# EAGLE board PiHAT_SSR_V3 (EAGLE 9.1.3)
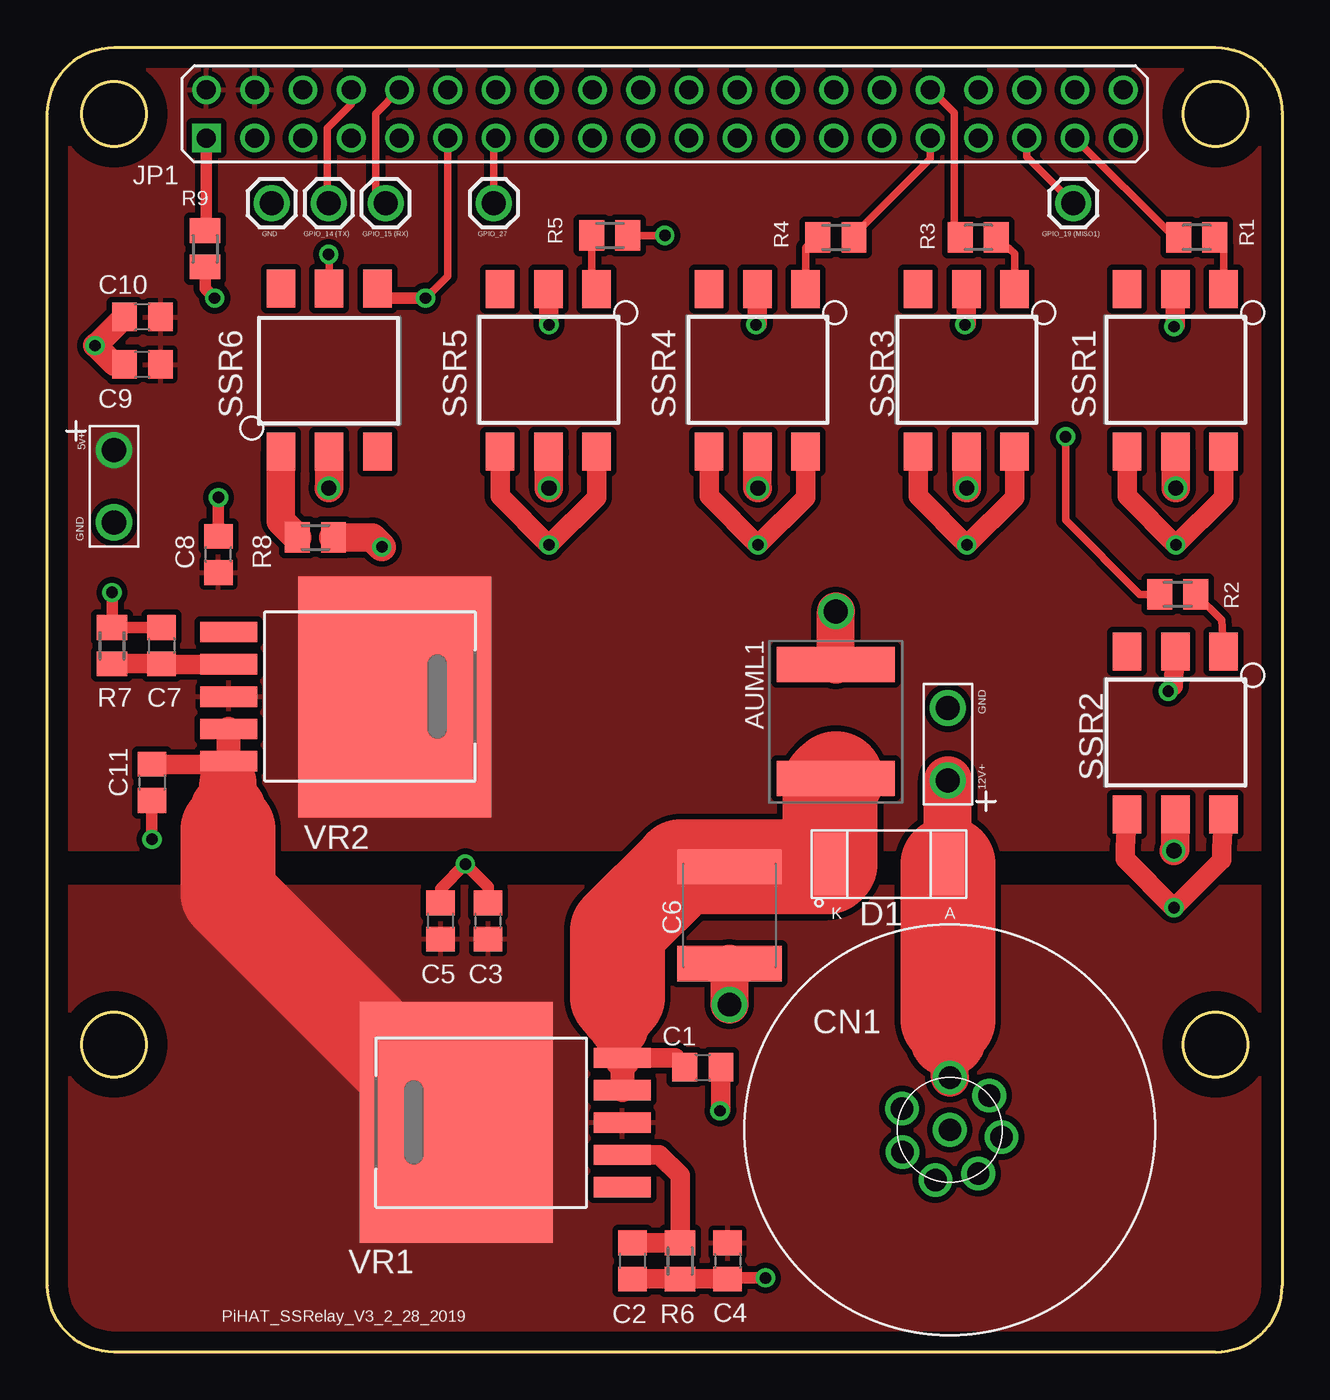
[diagram p0: board, top side]
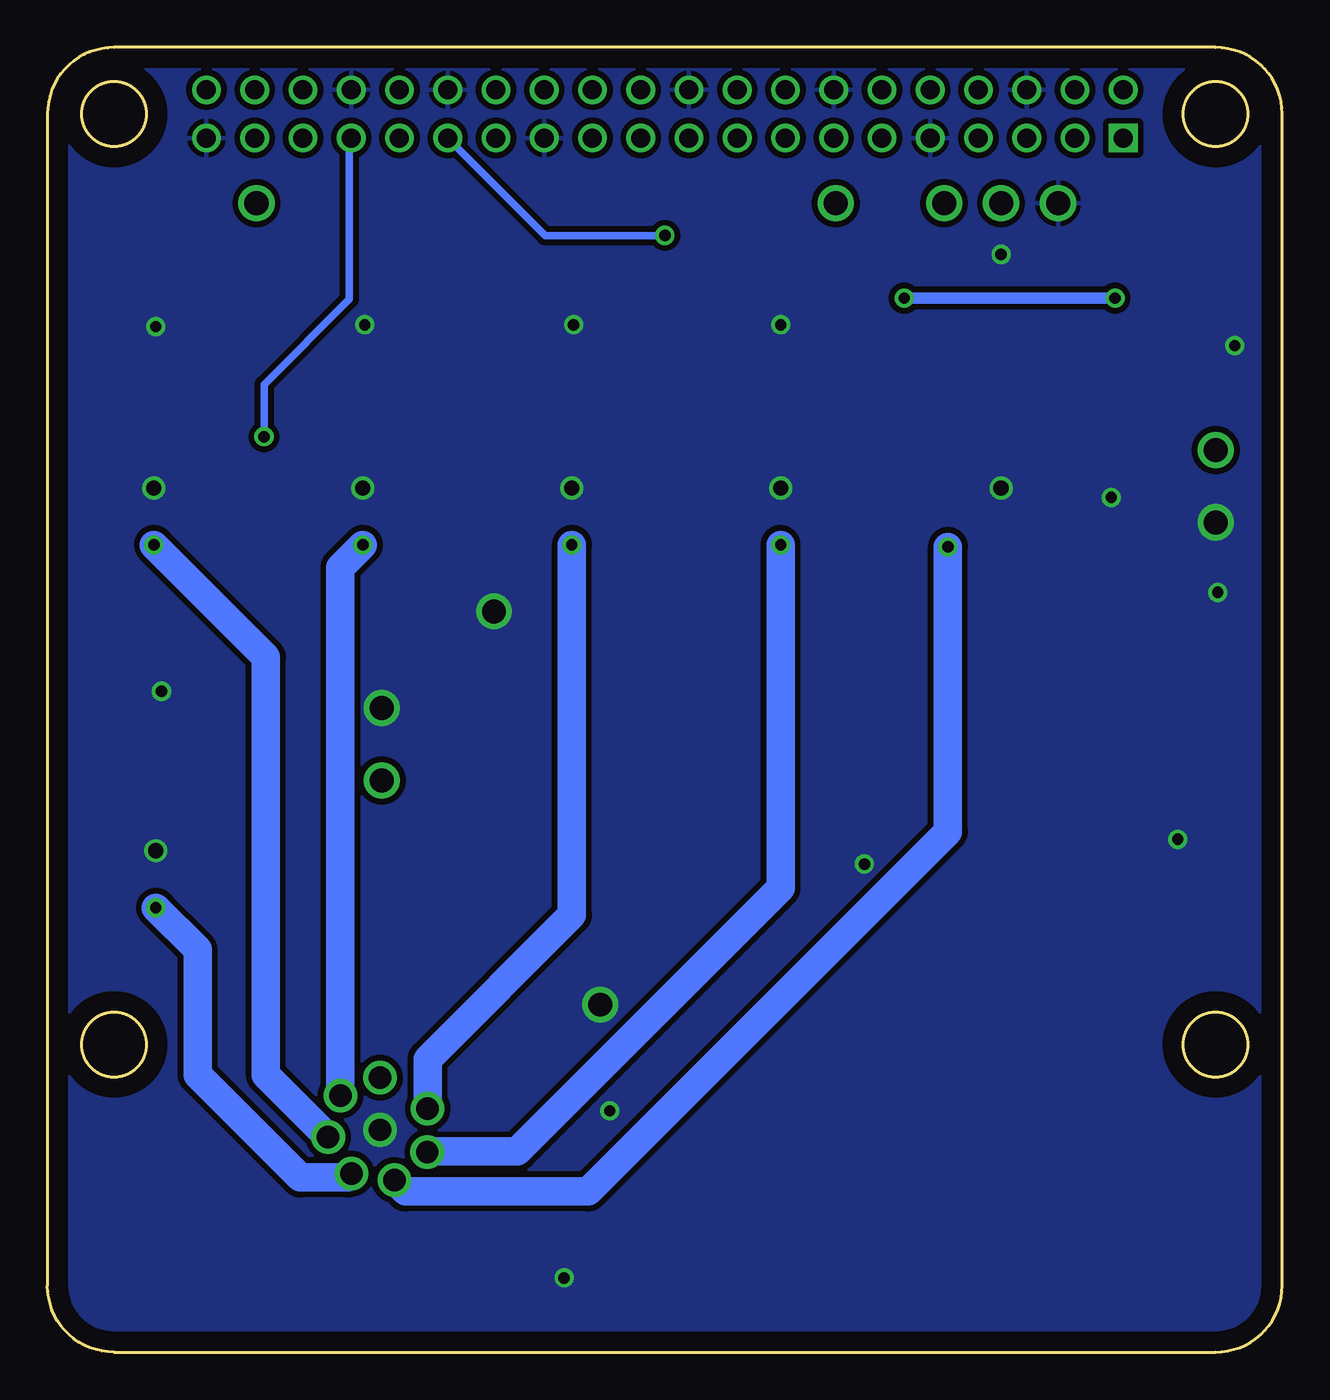
[diagram p1: board, bottom side, seen from below]

Size 65 x 68.7 mm. Coordinates in mm from the lower left corner, seen from the top.
Outline: 0,3.5 0,65.2 arc-90 3.5,68.7 61.5,68.7 arc-90 65,65.2 65,3.5 arc-90 61.5,0 3.5,0 arc-90 0,3.5
Outline: circle at 3.5,16.2 radius 1.7
Outline: circle at 3.5,65.2 radius 1.7
Outline: circle at 61.5,65.2 radius 1.7
Outline: circle at 61.5,16.2 radius 1.7
Copper layers (1*16): Top 0.035mm / dielectric 1.5mm / Bottom 0.035mm
Design rules "default *": minimum track width 10mil, minimum drill 6mil, track to track 12mil, track to pad 12mil, pad to pad 12mil, via to via 12mil, smd to smd 8mil, copper to edge 40mil, drill to drill 8mil, minimum pad ring 10mil, minimum via ring 8mil, stop-mask expansion 4mil, vias tented up to drill 0mil, thermal gap 10mil
tKeepout: area 0,62.7 to 6,68.7; area 59,62.7 to 65,68.7; area 0,12.7 to 6.5,19.2; area 58.5,12.7 to 65,19.2

## Footprints (pad centres in the part's own frame; a part is rotated, then mirrored left to right if it is on the bottom)
SMD-SPECIAL_28PIN_PIC32_11_3_2011_MOD5_20_13_SMT_CAP_2220 = smd 1.85 x 6.2: 1 -3,0; 2 3,0
C0805 = smd 1.3 x 1.5: 1 -0.95,0; 2 0.95,0
C2220K = smd 1.85 x 5.5: 1 -2.55,0; 2 2.55,0
M12_8PIN_CODE_A = drill 1.18: P$1 2.75,0; P$2 1.119,2.512; P$3 -1.162,2.492; P$4 -2.643,0.758; P$5 -2.306,-1.498; P$6 -0.383,-2.723; P$7 1.804,-2.075; P$8 0,0
SCHOTTKY_DIODE_SMD_DO-214AB = smd 1.651 x 3.302: P$1 -3.099,0; P$2 3.099,0
1X01 = drill 1.27: 1 0,0
1X02_BIG = drill 1.27: P$1 0,0; P$2 3.81,0
2X20 = drill 1 square: 1 -24.13,-1.27 | drill 1: 2 -24.13,1.27; 3 -21.59,-1.27; 4 -21.59,1.27; 5 -19.05,-1.27; 6 -19.05,1.27; 7 -16.51,-1.27; 8 -16.51,1.27; 9 -13.97,-1.27; 10 -13.97,1.27; 11 -11.43,-1.27; 12 -11.43,1.27; 13 -8.89,-1.27; 14 -8.89,1.27; 15 -6.35,-1.27; 16 -6.35,1.27; 17 -3.81,-1.27; 18 -3.81,1.27; 19 -1.27,-1.27; 20 -1.27,1.27; 21 1.27,-1.27; 22 1.27,1.27; 23 3.81,-1.27; 24 3.81,1.27; 25 6.35,-1.27; 26 6.35,1.27; 27 8.89,-1.27; 28 8.89,1.27; 29 11.43,-1.27; 30 11.43,1.27; 31 13.97,-1.27; 32 13.97,1.27; 33 16.51,-1.27; 34 16.51,1.27; 35 19.05,-1.27; 36 19.05,1.27; 37 21.59,-1.27; 38 21.59,1.27; 39 24.13,-1.27; 40 24.13,1.27
M0805 = smd 1.3 x 1.6: 1 -0.95,0; 2 0.95,0
SPARKFUN_6-SMD_OMRON_SSRELAY = smd 1.5 x 2: 1 -3.81,-5.08; 2 -1.27,-5.08; 3 1.27,-5.08; 4 1.27,3.493; 5 -1.27,3.493; 6 -3.81,3.493
SMD-SPECIAL_28PIN_PIC32_11_3_2011_DPAK-5 = smd 1.067 x 2.997: 1 -3.416,-7.468; 2 -1.714,-7.468; 3 -0.013,-7.468; 4 1.689,-7.468; 5 3.391,-7.468 | smd 12.7 x 10.16: 6 0,1.27

## Placement (x,y rotation side)
AUML1  SMD-SPECIAL_28PIN_PIC32_11_3_2011_MOD5_20_13_AUML_MULTI-LAYER-VARISTOR  [SMD-SPECIAL_28PIN_PIC32_11_3_2011_MOD5_20_13_SMT_CAP_2220]  41.5,33.2 270 top
C1  0.1uF  [C0805]  34.5,15 0 top
C2  0.1uF  [C0805]  30.8,4.8 90 top
C3  0.1uF  [C0805]  23.2,22.7 90 top
C4  0.01uF  [C0805]  35.8,4.8 270 top
C5  10uF  [C0805]  20.7,22.7 90 top
C6  10uF, 100V  [C2220K]  35.9,23 90 top
C7  0.1uF  [C0805]  6,37.2 270 top
C8  0.1uF  [C0805]  9,42 90 top
C9  0.01uF  [C0805]  5,52 180 top
C10  10uF  [C0805]  5,54.5 180 top
C11  0.1uF  [C0805]  5.5,30 270 top
CN1  M12_8PIN_CODE_A  [M12_8PIN_CODE_A]  47.5,11.7 90 top
D1  SCHOTTKY_DIODE_4A  [SCHOTTKY_DIODE_SMD_DO-214AB]  44.3,25.7 0 top
J1  [1X01]  11.8,60.5 0 top
J2  [1X01]  14.8,60.5 0 top
J3  [1X01]  17.8,60.5 0 top
J4  [1X01]  54,60.5 0 top
J5  [1X01]  23.5,60.5 0 top
J6  [1X02_BIG]  47.4,30.1 90 top
J7  [1X02_BIG]  3.5,47.5 270 top
JP1  [2X20]  32.5,65.2 0 top
R1  665  [M0805]  60.5,58.7 0 top
R2  665  [M0805]  59.5,39.9 0 top
R3  665  [M0805]  49,58.7 0 top
R4  665  [M0805]  41.5,58.7 180 top
R5  665  [M0805]  29.6,58.8 180 top
R6  170k  [M0805]  33.3,4.8 90 top
R7  100k  [M0805]  3.4,37.2 270 top
R8  1.2k  [M0805]  14.1,42.9 180 top
R9  665  [M0805]  8.3,58.1 90 top
SSR1  SPARKFUN_OPTO_SSRELAY_OMRON_G3VM-61E1  [SPARKFUN_6-SMD_OMRON_SSRELAY]  58.1,50.9 180 top
SSR2  SPARKFUN_OPTO_SSRELAY_OMRON_G3VM-61E1  [SPARKFUN_6-SMD_OMRON_SSRELAY]  58.1,31.8 180 top
SSR3  SPARKFUN_OPTO_SSRELAY_OMRON_G3VM-61E1  [SPARKFUN_6-SMD_OMRON_SSRELAY]  47.1,50.9 180 top
SSR4  SPARKFUN_OPTO_SSRELAY_OMRON_G3VM-61E1  [SPARKFUN_6-SMD_OMRON_SSRELAY]  36.1,50.9 180 top
SSR5  SPARKFUN_OPTO_SSRELAY_OMRON_G3VM-61E1  [SPARKFUN_6-SMD_OMRON_SSRELAY]  25.1,50.9 180 top
SSR6  SPARKFUN_OPTO_SSRELAY_OMRON_G3VM-61E1  [SPARKFUN_6-SMD_OMRON_SSRELAY]  16.1,52.5 0 top
VR1  SMD-SPECIAL_28PIN_PIC32_11_3_2011_LT3083  [SMD-SPECIAL_28PIN_PIC32_11_3_2011_DPAK-5]  22.8,12.1 90 top
VR2  SMD-SPECIAL_28PIN_PIC32_11_3_2011_LT3083  [SMD-SPECIAL_28PIN_PIC32_11_3_2011_DPAK-5]  17,34.5 270 top

## Library data of the parts
AUML1 CN1 D1 J1-J7 JP1 SSR1-SSR6 VR1 VR2 = MyLibrary
C1-C11 = rcl; SPICEPREFIX: C
R1-R9 = rcl; SPICEPREFIX: R

## Nets
3V3: JP1.1 R9.2
5V: C8.1 C9.1 C10.1 J7.P$1 JP1.2 JP1.4 VR2.3 VR2.6
8V5: C3.1 C4.1 C5.1 C11.1 VR1.3 VR1.6 VR2.4 VR2.5
12V_PWR_IN: CN1.P$1 D1.P$2 J6.P$1
ENABLE_SOL_12V: CN1.P$4 R8.1
GND: AUML1.1 C1.2 C2.1 C3.2 C4.2 C5.2 C6.1 C7.1 C8.2 C9.2 C10.2 C11.2 CN1.P$8 J1.1 J6.P$2 J7.P$2 JP1.6 JP1.9 JP1.14 JP1.20 JP1.25 JP1.30 JP1.34 JP1.39 R6.1 R7.1 SSR1.2 SSR1.5 SSR2.2 SSR2.5 SSR3.2 SSR3.5 SSR4.2 SSR4.5 SSR5.2 SSR5.5 SSR6.2 SSR6.5
GPIO_5: JP1.29 R5.1
GPIO_6: JP1.31 R4.1
GPIO_12: JP1.32 R3.1
GPIO_13: JP1.33 R2.1
GPIO_17: JP1.11 R9.1 SSR6.4
GPIO_19: J4.1 JP1.35
GPIO_26: JP1.37 R1.1
GPIO_27: J5.1 JP1.13
IND_LED: CN1.P$6 SSR1.4 SSR1.6
N$1: R1.2 SSR1.1
N$2: R4.2 SSR4.1
N$3: R5.2 SSR5.1
N$4: R3.2 SSR3.1
N$5: R2.2 SSR2.1
N$6: R8.2 SSR6.1
PWR_IN_12V_D: AUML1.2 C1.1 C6.2 D1.P$1 VR1.4 VR1.5
RX: J3.1 JP1.10
SOL_1: CN1.P$7 SSR3.4 SSR3.6
SOL_2: CN1.P$5 SSR2.4 SSR2.6
SOL_3: CN1.P$2 SSR4.4 SSR4.6
SOL_CLEAN_COOL: CN1.P$3 SSR5.4 SSR5.6
TX: J2.1 JP1.8
VSET_5V: C7.2 R7.2 VR2.2
VSET_8V5: C2.2 R6.2 VR1.2

## Tracks (layer width: path | path; a pad name or v marks a point on that pad's centre or on a via)
3V3
  Top 0.61: JP1.1 8.37,59.12 R9.2
5V
  pour Top: 0,26.5 0,68.7 65,68.7 65,26.5
8V5
  Top 1.016: C11.1 9.53,30.95 VR2.5
  Top 1.27: VR2.4 VR2.5 9.53,30 9.5,30
  Top 3: 9.5,28.5 9.5,30
  Top 4: 9.5,28.5 9.5,27.5
  Top 5: 9.5,27.5 9.5,24.13 VR1.6
  pour Top: 0,24.5 65,24.5 65,0 0,0
12V_PWR_IN
  Top 2: CN1.P$1 47.5,16.4
  Top 2.54: D1.P$2 J6.P$1
  Top 3: 47.4,16.5 47.5,16.4
  Top 4: 47.4,17.5 47.4,16.5
  Top 5: D1.P$2 47.4,17.5
ENABLE_SOL_12V  (via drill 0.6)
  Top 1.5: R8.1 17.1,42.9 v17.6,42.4
  Bottom 1.5: v17.6,42.4 17.6,27.4 36.54,8.46 46.14,8.46 CN1.P$4
GND  (via drill 0.6, 0.8, 1.25)
  Top 0.406: SSR6.5 14.83,57.77 v14.8,57.8
  Top 0.61: C8.2 v9,45 | C5.2 20.7,24.4 v22,25.7 23.2,24.5 C3.2 | C7.1 R7.1 v3.4,39.99 v3.4,40 | C11.2 v5.5,27 | v37.8,3.9 35.85,3.9 C4.2
  Top 1.016: SSR4.2 37.37,54.17 v37.3,54.1 | SSR1.2 59.37,54.07 v59.3,54 | SSR2.2 59.27,35.07 v59,34.8 | SSR3.2 48.37,54.17 v48.3,54.1 | C4.2 R6.1 C2.1 | v35.4,12.7 35.45,12.75 C1.2 | v26.4,54.1 26.4,55.92 26.39,55.93 26.39,55.96 SSR5.2
  Top 1.27: C10.2 2.8,53.25 2.55,53 | 2.55,53 v2.5,53 | 2.55,53 3.55,52 C9.2
  Top 1.5: SSR6.2 14.83,45.53 v14.8,45.5 | SSR4.5 37.37,45.53 v37.4,45.5 | SSR3.5 48.4,47.38 v48.4,45.5 | SSR1.5 59.4,47.38 v59.4,45.5 | SSR2.5 59.37,26.47 v59.3,26.4 | v26.4,45.5 26.4,47.38 SSR5.5
  Top 2: C6.1 v35.9,18.3 | AUML1.1 v41.5,39
  pour Bottom: -1,69.2 65.5,69.2 65.5,-0.8 -1,-0.8
GPIO_5  (via drill 0.6)
  Top 0.406: R5.1 v32.5,58.8
  Bottom 0.406: v32.5,58.8 38.8,58.8 JP1.29
GPIO_6
  Top 0.406: JP1.31 46.47,62.83 42.35,58.71 42.36,58.71 R4.1
GPIO_12
  Top 0.406: R3.1 47.73,59.12 47.73,65.27 46.53,66.47 JP1.32
GPIO_13  (via drill 0.6)
  Top 0.406: v53.6,48.2 53.6,43.8 57.5,39.9 R2.1
  Bottom 0.406: JP1.33 49.11,63.83 49.11,55.44 53.6,50.95 v53.6,48.2
GPIO_17  (via drill 0.6)
  Top 0.406: v19.9,55.5 21.07,56.67 JP1.11
  Top 0.61: R9.1 8.3,56 v8.8,55.5 | SSR6.4 17.86,55.5 v19.9,55.5
  Bottom 0.61: v8.8,55.5 v19.9,55.5
GPIO_19
  Top 0.406: J4.1 51.55,62.95 JP1.35
GPIO_26
  Top 0.406: R1.1 59.32,58.7 JP1.37
GPIO_27
  Top 0.406: J5.1 23.5,63.82 JP1.13
IND_LED  (via drill 0.6)
  Top 1.016: SSR1.4 56.83,45.07 v59.4,42.5 61.91,45.01 SSR1.6
  Bottom 1.5: v59.4,42.5 53.5,36.6 53.5,14.59 CN1.P$6
N$1
  Top 0.406: SSR1.1 61.91,58.24 R1.2
N$2
  Top 0.406: SSR4.1 39.91,58.16 R4.2
N$3
  Top 0.406: R5.2 28.65,56.24 SSR5.1
N$4
  Top 0.406: SSR3.1 50.91,56.3 50.91,57.84 R3.2
N$5
  Top 0.406: SSR2.1 61.81,38.54 R2.2
N$6
  Top 1.5: R8.2 12.29,43.76 SSR6.1
PWR_IN_12V_D
  Top 1.016: VR1.5 33.06,15.49 C1.1
  Top 1.27: VR1.5 VR1.4
  Top 2: 30.1,17 30.27,16.83 VR1.5
  Top 3: 30,17.9 30,17.1 30.1,17
  Top 4: 30,18.7 30,17.9
  Top 5: AUML1.2 41.2,29.9 D1.P$1 41.05,25.55 C6.2 33.36,25.55 30,22.19 30,18.7
RX
  Top 0.406: JP1.10 17.27,65.21 17.27,61.08 J3.1
SOL_1  (via drill 0.6)
  Top 1.016: SSR3.4 45.83,45.07 v48.4,42.5 50.91,45.01 SSR3.6
  Bottom 1.5: v48.4,42.5 49.58,41.33 CN1.P$7
SOL_2  (via drill 0.6)
  Top 1.016: SSR2.4 56.73,26.57 56.73,25.97 v59.3,23.4 61.81,25.91 61.81,26.51 SSR2.6
  Bottom 1.5: v59.3,23.4 57.1,21.2 57.1,14.6 51.69,9.19 49.2,9.19 CN1.P$5
SOL_3  (via drill 0.6)
  Top 1.016: SSR4.4 34.83,45.07 v37.4,42.5 39.91,45.01 SSR4.6
  Bottom 1.5: v37.4,42.5 37.4,23.01 44.99,15.42 CN1.P$2
SOL_CLEAN_COOL  (via drill 0.6)
  Top 1.016: SSR5.6 28.91,45.01 v26.4,42.5 23.83,45.07 SSR5.4
  Bottom 1.5: v26.4,42.5 26.4,24.43 40.26,10.57 44.98,10.57 CN1.P$3
TX
  Top 0.406: JP1.8 15.99,65.72 14.73,64.45 14.73,60.57 J2.1
VSET_5V
  Top 1.016: VR2.2 6.04,36.22 C7.2 R7.2
VSET_8V5
  Top 1.016: C2.2 R6.2 33.3,9.3 32.22,10.39 VR1.2

## Text on the board
tPlace: 5v+ | GND
tNames: GND | GPIO_14 (TX) | GPIO_15 (RX) | GPIO_27 | GPIO_19 (MISO1) | GND | 12V+ | PiHAT_SSRelay_V3_2_28_2019